# Altium PCB 滚动足球蓝牙款 V1.0 双面板 板厚1.0mm.PcbDoc (part 1 of 2)
Units mm, origin at the board's own origin, x right, y up, seen from the top; angles counter-clockwise.
Board outline 50.85 x 46.58 mm, 2 copper layers (Top Layer, Bottom Layer); 60 components, 35 nets, 162 pads, 92 vias.
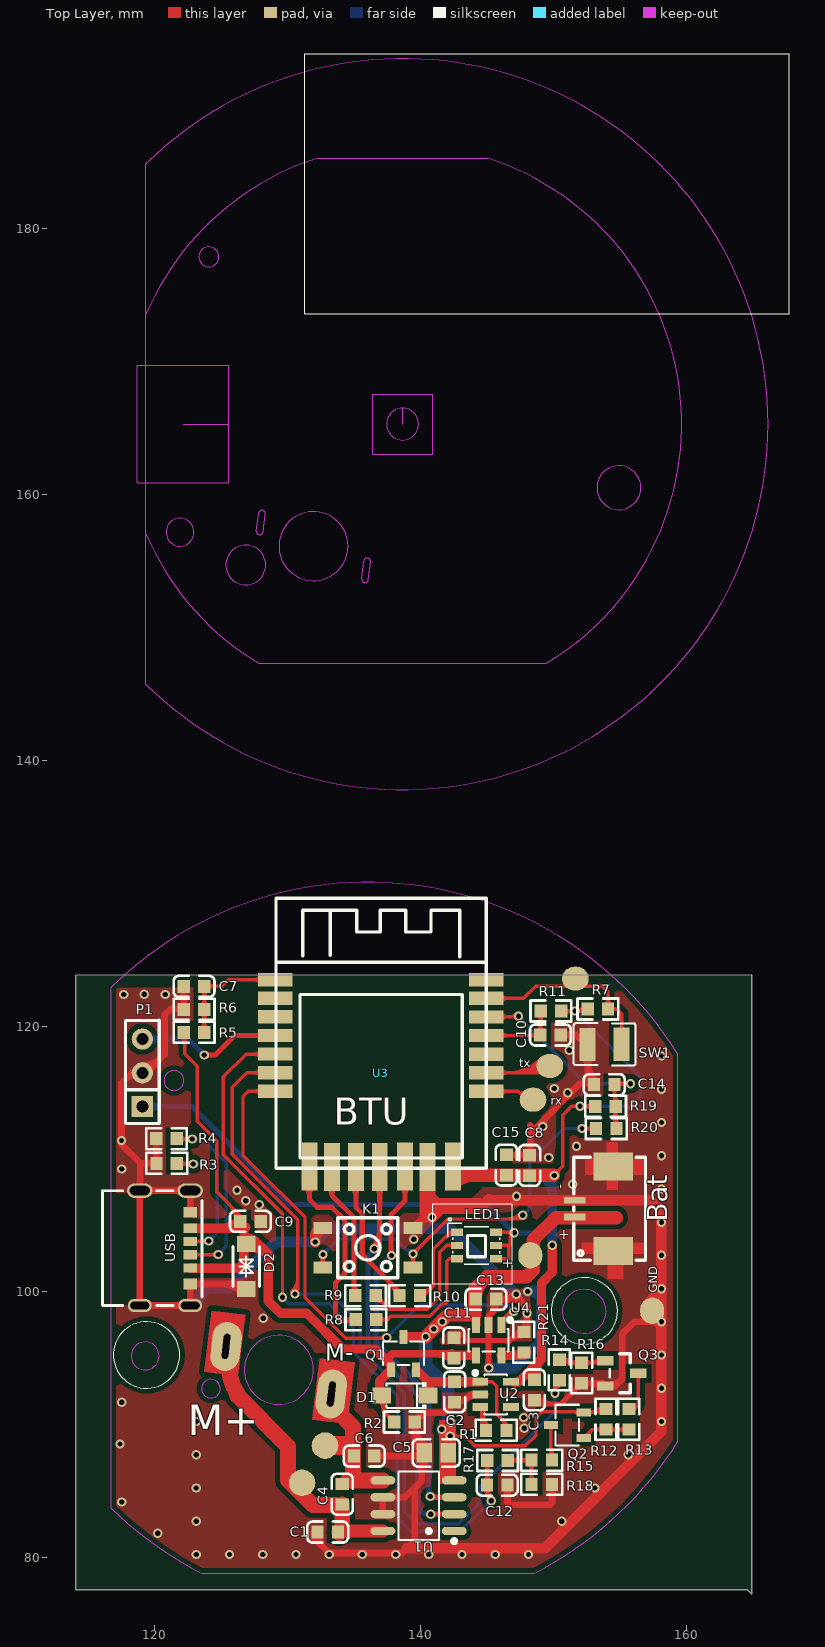
[diagram p0: Top Layer view]
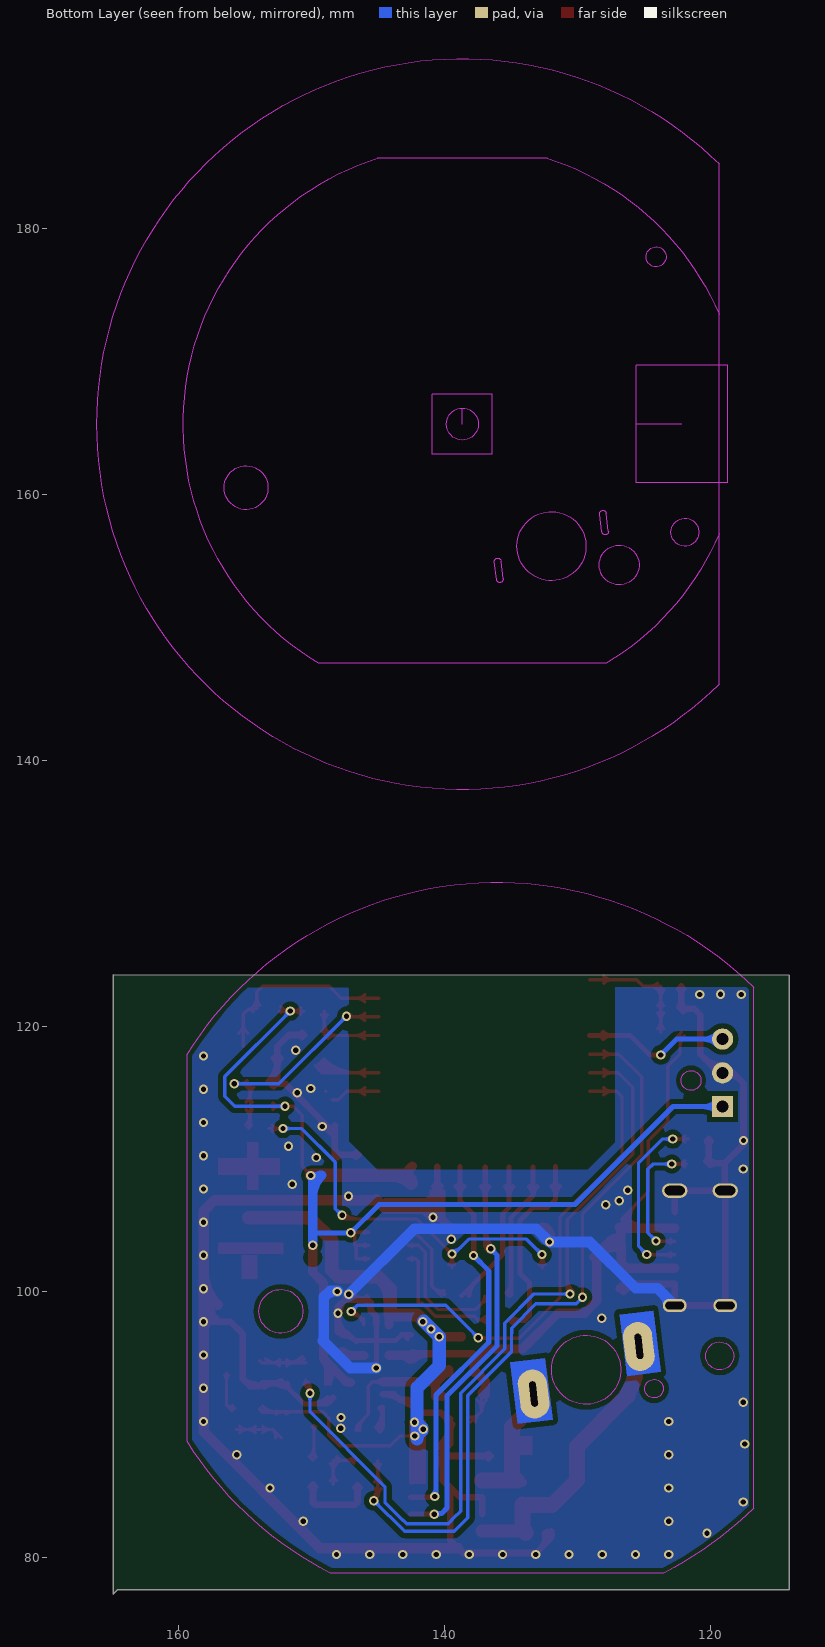
[diagram p1: Bottom Layer view, seen from below]
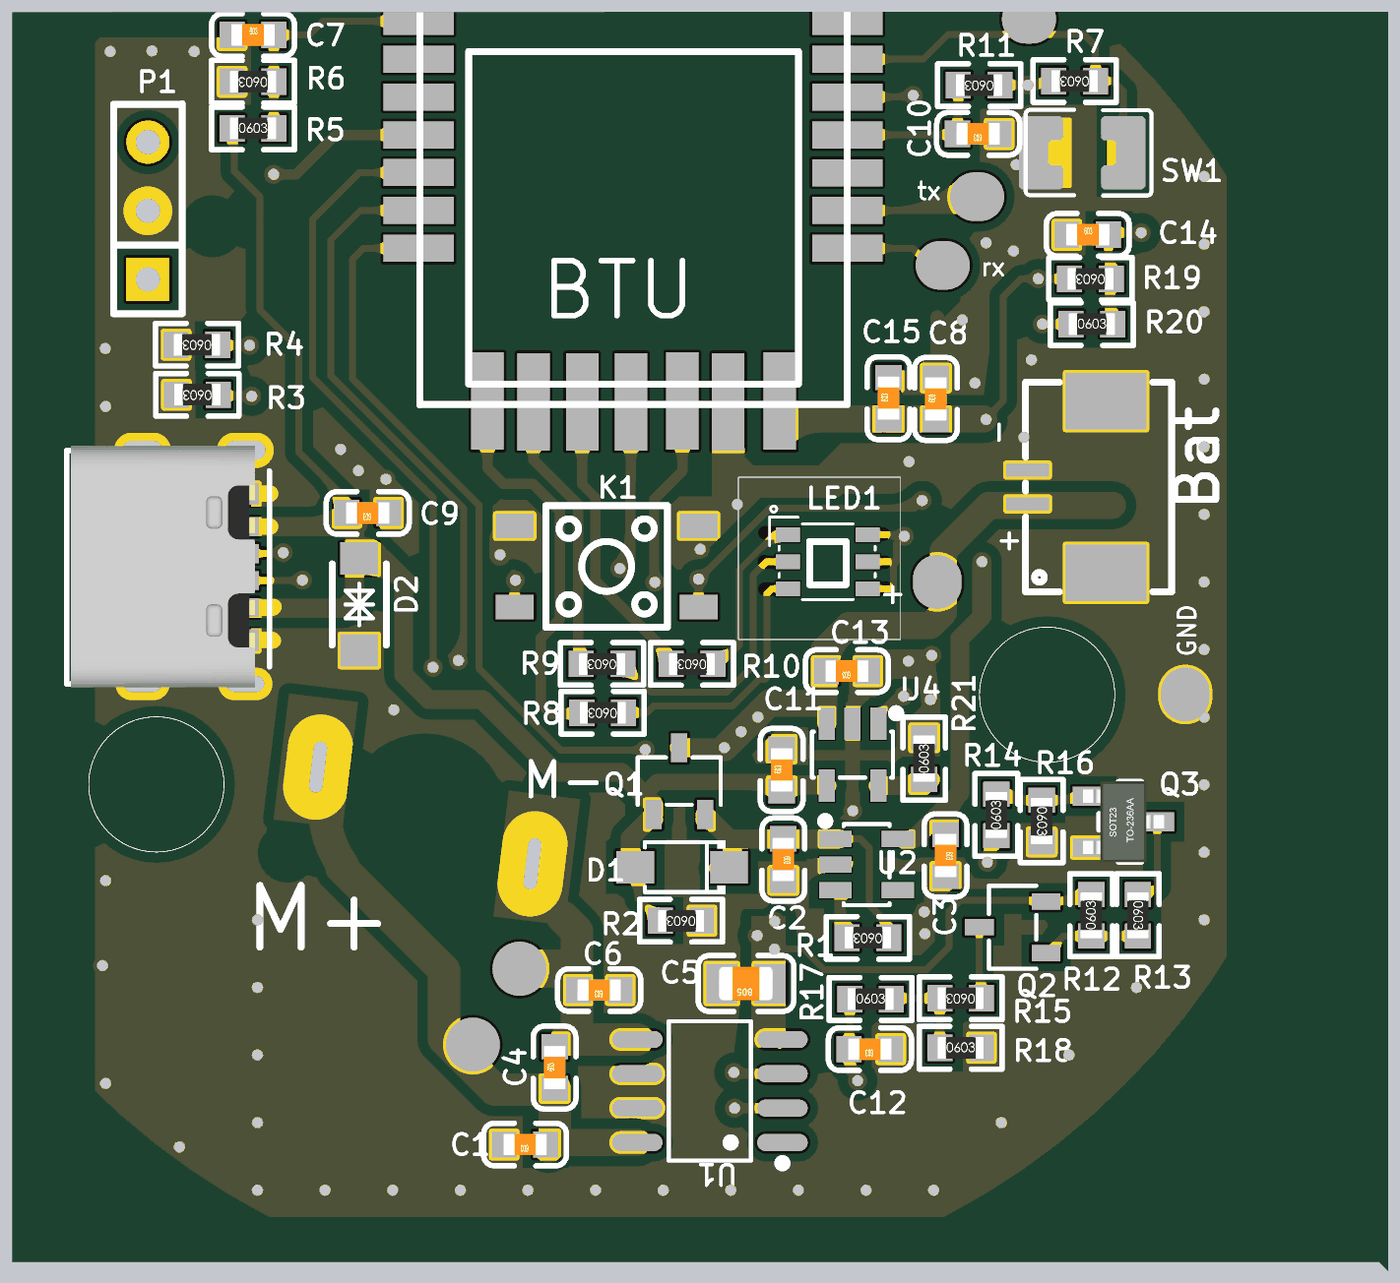
[diagram p3: 3D render of the assembled board from above, using the file's embedded part models]

## Layer stack, top to bottom
Top Layer: signal copper 0.0356
Dielectric: dielectric 0.32, FR-4, Dk 4.8
Bottom Layer: signal copper 0.0356

## Board outline
114.097,123.825 114.097,77.597 164.617,77.597 164.948,77.267 164.948,123.85

## Design rules (kind name [scope] priority, off if disabled: settings)
Clearance [All] p1: gap=0.254
ComponentClearance [All] p1: gap=0 collisioncheckmode=3 verticalgap=0 showdistances=FALSE
MinimumSolderMaskSliver [All] p1: minsoldermaskwidth=0
PolygonConnect [All] p1: connectstyle=Direct reliefconductorwidth=0.254 reliefentries=4 polygonreliefangle="90 Angle"
RoutingVias [All] p1: holewidth=0.711 width=1.27 viastyle="Through Hole" minholewidth=0.711 minwidth=1.27 maxholewidth=0.711 maxwidth=1.27
SilkToSilkClearance [All] p1: silktosilkclearance=0
SilkscreenOverComponentPads [All] p1: minsilkscreentomaskgap=0
SolderMaskExpansion [All] p1: expansion=0.102
TestPointUsage [All] p1: valid=0 allowmultiple=FALSE
Testpoint [All] p1: side=15 testpointundercomponent=TRUE minsize=1.016 maxsize=2.54 preferedsize=1.524 minholesize=0 maxholesize=1.016 preferedholesize=0.813 testpointgrid=0.025 style=1023 order=0-112345678
Width [All] p1: maxlimit=5.08 minlimit=0.254 preferedwidth=0.254 minimp=50.000000 maximp=50.000000 favimp=50.000000
20 further rules are at their usual default settings.

## Classes and differential pairs
component class 旋转球: B- Bat C1 C2 C3 C4 C5 C6 C7 C8 C9 C10 C11 C12 C13 C14 C15 D1 D2 K1 La1 La2 LED1 M+ M- P1 Q1 Q2 Q3 R1 R2 R3 R4 R5 R6 R7 R8 R9 R10 R11 R12 R13 R14 R15 R16 R17 R18 R19 R20 R21 SW1 U1 U2 U3 U4 USB

## Components (designator, comment, footprint, x,y, rotation, side; value= is the part's Value field where it differs from the comment)
Bat "BAT" CONN-SMD_1.25-2PWT 154.559,106.401 r270 top (schematic designator CN1)
C1 "0.1uf/25v" 0603_C 133.045,81.94 r180 top
C2 "1uf" 0603_C 142.596,92.481 r90 top
C3 "10uF" 0603_C 148.59,92.634 r90 top
C4 "0.1uf/25v" 0603_C 134.137,84.785 r270 top
C5 "4.7uf/16v" 0805_C 141.211,87.897 r180 top
C6 "0.1uf/25v" 0603_C 135.788,87.655 r180 top
C7 "0.1uf/25v" 0603_c 122.987,122.987 r0 top
C8 "1uf/25v" 0603_C 148.234,109.525 r270 top
C9 "0.1UF" 0603_c 127.229,105.308 r180 top
C10 "100nF" 0603_c 149.801,119.329 r180 top
C11 "4.7UF" 0603_c 142.532,95.796 r270 top
C12 "100nF" 0603_C 145.796,85.471 r180 top
C13 "10UF" 0603_C 144.945,99.454 r180 top
C14 "100nF" 0603_c 153.848,115.595 r0 top
C15 "100nf/25v" 0603_C 146.482,109.55 r270 top
D1 "" SOD-123FL 138.697,92.037 r180 top
D2 "SMF5.0CA_C726939" "SOD-123 双向" 126.975,102.083 r90 top
GND "J-CSD" TP#1 157.455,98.59 r90 bottom (schematic designator TP3)
K1 "KEY" SW-SMD_4P-L4.5-W4.5-P3.00-LS7.0 136.061,103.326 r0 top locked
LED1 "#NAME?" LED-SMD-6P_S6-3528RGBTA 144.221,103.353 r270 top
M+ "" PAD2#1 125.542,95.907 r150 top (schematic designator M+1)
M- "" PAD2#2 133.325,92.177 r60 top (schematic designator M-1)
P1 "DEBUG" SIP4-2.54 119.101,113.944 r90 top
Q1 "CJ3401" SOT-23 138.963,94.869 r270 top
Q2 "SI2301 P" SOT-23 151.587,90.195 r0 top
Q3 "S8050" SOT-23(SOT-23-3) 155.169,93.878 r180 top
R1 "10k" 0603_R 145.72,89.586 r180 top
R2 "10K" 0603_R 138.811,90.221 r180 top
R3 "5.1K" 0603_R 120.929,109.677 r180 top
R4 "5.1K" 0603_R 120.917,111.531 r180 top
R5 "10K" 0603_R 122.987,119.532 r0 top
R6 "20K" 0603_R 122.987,121.26 r180 top
R7 "560k" 0603_R 153.365,121.285 r180 top
R8 "1k" 0603_R 135.915,97.917 r180 top
R9 "1k" 0603_R 135.89,99.72 r180 top
R10 "1k" 0603_R 139.217,99.72 r180 top
R11 "10K" 0603_R 149.835,121.133 r180 top
R12 "560K" 0603_R 153.975,90.424 r270 top
R13 "1K" 0603_R 155.702,90.424 r90 top
R14 "1K" 0603_r 150.47,94.132 r270 top
R15 "560K" 0603_R 149.149,87.351 r180 top
R16 "10K" 0603_r 152.146,93.904 r90 top
R17 "1K" 0603_R 145.821,87.325 r0 top
R18 "100K" 0603_R 149.149,85.522 r0 top
R19 "10K" 0603_R 153.949,113.97 r180 top
R20 "100R" 0603_R 154,112.293 r0 top
R21 "5.1k" 0603_R 147.803,96.215 r270 top
rx "J-CSD" TP#1 148.488,114.465 r0 bottom (schematic designator TP3)
SW1 "#NAME?" SMD-X160 155.194,118.669 r0 top
TP3 "J-CSD" TP#1 151.676,123.571 r0 bottom
TP3 "J-CSD" TP#2 131.115,85.636 r0 bottom
TP3 "J-CSD" TP#2 132.842,88.443 r0 bottom
TP3 "J-CSD" TP#1 148.285,102.756 r90 bottom
tx "J-CSD" TP#1 149.758,117.005 r0 bottom (schematic designator TP3)
U1 "TC118S" SOP8 139.878,83.922 r90 top
U2 "SSP7615" SOT-23-5 145.847,92.735 r0 top
U3 "BTU" BTU 129.057,105.613 r0 top
U4 "LC4054" SOT-23-5 145.593,96.19 r270 top
USB "TYPE-C 6P" TPYE-C-6 120.802,103.302 r0 top locked (schematic designator USB1)

## Footprints (in the part's own frame and the unit in brackets; to place one, negate y for a bottom-side part, rotate by r counter-clockwise, add the part's x,y. Pads: shape width x height; smd on the part's side, far side on the other; paste and mask are expansions set on the pad)
0603_C [mm]
  rect 0.93x0.98 smd: 1(-0.77,0) 2(0.77,0)
  silkscreen extent -1.54,-0.79 1.54,0.79, body extent -0.8,-0.4 0.8,0.4, height 0.3
0603_c [mm]
  rect 0.93x0.98 smd: 1(-0.77,0) 2(0.77,0)
  silkscreen extent -1.54,-0.79 1.54,0.79, body extent -0.8,-0.4 0.8,0.4, height 0.3
0603_R [mm]
  rect 0.93x0.98 smd: 1(-0.77,0) 2(0.77,0)
  silkscreen extent -1.53,-0.79 1.54,0.79, body extent -0.85,-0.4 0.85,0.4, height 0.56
0603_r [mm]
  rect 0.93x0.98 smd: 1(-0.77,0) 2(0.77,0)
  silkscreen extent -1.53,-0.79 1.54,0.79, body extent -0.85,-0.4 0.85,0.4, height 0.56
0805_C [mm]
  rect 1.16x1.47 smd: 1(-0.89,0) 2(0.89,0)
  silkscreen extent -1.77,-1.04 1.77,1.04, body extent -1,-0.62 1,0.63, height 0.77
BTU [mm]
  rect 2.6x1 smd paste+0 mask+0.102: 1(0.051,17.882) 2(0.051,16.482) 3(0.051,15.082) 4(0.049,13.68) 5(0.051,12.282) 6(0.051,10.882) 7(0.051,9.482) 15(15.9,9.48) 16(15.9,10.88) 17(15.9,12.28) 18(15.9,13.68) 19(15.9,15.08) 20(15.9,16.48) 21(15.9,17.88)
  rect 1.2x3.6 smd paste+0 mask+0.102: 8(2.602,3.834) 9(4.3,3.8) 10(6.1,3.8) 11(7.9,3.8) 12(9.802,3.834) 13(11.5,3.8) 14(13.402,3.834)
  silkscreen extent 0.1,3.68 15.9,24
CONN-SMD_1.25-2PWT [mm]
  rect 0.5x1.6 smd: 1(0.761,-2.934) 2(-0.489,-2.934)
  rect 2.1x3 smd: 3(3.311,-0.034) 4(-3.039,-0.034)
  silkscreen extent -3.74,-3.01 4.01,2.4
LED-SMD-6P_S6-3528RGBTA [mm]
  rect 0.55x0.9 smd paste+0 mask+0.05: 1(-1.148,-1.458) 2(-0.148,-1.458) 3(0.852,-1.458) 4(0.852,1.492) 5(-0.148,1.492) 6(-1.148,1.492)
  silkscreen extent -2.21,-2.13 1.25,1.77
PAD2#1 [mm]
  oval 3.7x2.2 hole 0.5 slot 1.9 at 113 deg rot 113: 1(0.127,0.076)
PAD2#2 [mm]
  oval 3.7x2.2 hole 0.5 slot 1.9 at 23 deg rot 23: 1(0.127,0.076)
SIP4-2.54 [mm]
  rect 1.6x1.6 hole 0.9: 1(0,0)
  round 1.6 hole 0.9: 2(2.54,0) 3(5.08,0)
  silkscreen extent -1.27,-1.27 6.5,1.27
SMD-X160 [mm]
  rect 1.2x2.5 smd paste-100 mask+0.051: 1(-2.595,-0.044) 2(-0.034,-0.04)
  silkscreen extent -3.64,-1.62 1.01,1.55
"SOD-123 双向" [mm]
  rect 1.2x1.4 smd: 1(-1.864,0.06) 2(1.536,0.06)
  silkscreen extent -1.66,-0.94 1.34,1.06
SOD-123FL [mm]
  rect 1.4x1.2 smd: 1(1.579,-0.166) 2(-1.891,-0.166)
  silkscreen extent -1.76,-1.17 1.22,0.84
SOP8 [mm]
  oval 0.63x1.865 smd: 1(-1.905,-2.682) 2(-0.635,-2.682) 3(0.635,-2.682) 4(1.905,-2.682) 5(1.905,2.682) 6(0.635,2.682) 7(-0.635,2.682) 8(-1.905,2.682)
  silkscreen extent -2.82,-2.83 2.58,1.52
SOT-23 [mm]
  rect 1.07x0.6 smd: 1(0.719,-1.166) 2(0.719,0.734) 3(-1.751,-0.216)
  silkscreen extent -1.39,-1.75 0.36,1.32
SOT-23(SOT-23-3) [mm]
  rect 1.25x0.7 smd: 1(1.25,-0.95) 2(1.25,0.95) 3(-1.25,0)
  silkscreen extent -0.65,-1.46 0.9,1.46, body extent -1.5,-1.5 1.5,1.5, height 1.3
SOT-23-5 [mm]
  rect 1.2x0.6 smd paste+0 mask+0.05: 1(-1.325,0.51) 2(-1.325,-0.44) 3(-1.325,-1.39) 4(0.975,-1.39) 5(0.975,0.51)
  silkscreen extent -1.85,-1.94 0.67,1.32
SW-SMD_4P-L4.5-W4.5-P3.00-LS7.0 [mm]
  rect 1.4x0.9 smd: 1(-3.4,1.5) 2(3.4,1.5) 3(-3.4,-1.5) 4(3.4,-1.5)
  silkscreen extent -2.25,-2.25 2.25,2.25
TP#1 [mm]
  oval 2x1.8 smd far side: 1(0,0)
TP#2 [mm]
  round 2 smd far side: 1(0,0)
TPYE-C-6 [mm]
  oval 1.9x1.1 hole 0.7 slot 1.5 at 0 deg: 7(-1.9,4.32) 7(1.9,4.32)
  oval 1.8x1 hole 0.6 slot 1.4 at 0 deg: 7(-1.9,-4.32) 7(1.9,-4.32)
  rect 1x0.7 smd: A5(1.9,0.5) A9(1.9,-1.5) B5(1.9,-0.5) B9(1.9,1.5)
  rect 1x0.8 smd: A12(1.9,-2.7) B12(1.9,2.7)
  silkscreen extent -4.7,-4.32 2.79,4.32, body extent -4.55,-4.45 2.25,4.49, height 3.41

## Part data
Bat: library part HC-1.25-2PLT
C1 C2 C3 C4 C5 C6 C7 C8 C15: library part Cap, "Capacitor"
C9 C10 C11 C12 C13: library part CAP
C14: library part CAP_0603
D1: library part "Diode 1N4148", "High Conductance Fast Diode"
K1: library part TS-1002S-05026C
LED1: library part S6-3528RGBTA
M+ M-: library part CON1
P1: library part "Header 4", "Header, 4-Pin"
Q2: library part JMTL3400A
Q3: library part NPN_sot23, "NPN三极管"
R1 R3 R4 R5 R6 R7 R8 R9 R10 R11 R12 R13 R15 R17 R18 R21: library part RES
R2 R14 R16: library part Res2, "Resistor"
R19 R20: library part Res_0603
SW1: library part SW-18010P
U2: library part SSP7615-33M5R
U4: library part LTC4054

## Via types
v1: diameter 0.7, hole 0.4, Top Layer to Bottom Layer, tented both sides, 92 vias

## Nets (pads, with @x,y where several pads share a name; then routed paths per layer and width w, separated by ;. In a path a pad name is that pad's centre, name@x,y a point inside that pad or via, vN(x,y) a via of type N, cw(c..) or ccw(c..) an arc to the next point about the centre after c; other vN are vias at no path point)
3V3: C3.2 C8.2 C15.2 LED1.4 LED1.5 LED1.6 P1.1 R7.2 R11.1 R19.2 U2.5 U3.14 | length 110.9
  Top Layer w0.254: LED1.4@145.713,102.501 146.672,102.501 146.672,103.399 146.774,103.501 ; LED1.5@145.713,103.501 146.774,103.501 ; LED1.6@145.713,104.501 v1@146.908,104.501 ; LED1.4@145.993,102.396 cw(c146.246,102.143) 146.246,102.501 cw(c146.246,102.858) LED1.4@145.993,102.605 ; LED1.5@145.993,103.396 cw(c146.246,103.143) 146.246,103.501 cw(c146.246,103.858) LED1.5@145.993,103.605 ; LED1.6@145.993,104.396 cw(c146.246,104.143) 146.246,104.501 cw(c146.246,104.858) LED1.6@145.993,104.605 ; 146.393,104.501 cw(c146.393,103.772) 146.908,104.287 146.774,104.153 146.774,103.501 ; 146.663,104.501 ccw(c146.663,104.848) v1@146.908,104.602 ; v1@150.063,108.788 150.724,109.449 150.724,113.309 151.384,113.97 v1(152.019,113.97) 153.154,113.97 R19.2@153.179,113.995 ; v1@150.089,108.986 ccw(c150.089,109.402) 150.383,109.108 ; v1@150.312,108.763 cw(c150.973,108.763) 150.505,109.23 ; R11.1@150.605,121.133 v1(151.638,121.133) ; R11.1@150.844,120.894 cw(c151.421,120.317) 151.421,121.133 cw(c151.421,121.949) R11.1@150.844,121.372 ; v1@151.48,120.975 ccw(c151.1,120.594) 151.1,121.133 ccw(c151.1,121.671) v1@151.48,121.29 ; v1@151.796,120.975 cw(c152.176,120.594) 152.176,121.133 cw(c152.176,121.671) v1@151.796,121.29 ; v1@151.861,113.812 ccw(c151.481,113.431) 151.481,113.97 ccw(c151.481,114.508) v1@151.861,114.127 ; 152.087,121.133 cw(c152.087,120.752) R7.2@152.356,121.021 ; v1@152.177,113.812 cw(c152.557,113.431) 152.557,113.97 cw(c152.557,114.508) v1@152.177,114.127 ; R7.2@152.329,121.469 cw(c151.638,122.012) v1(151.638,121.133) ; v1@152.362,113.97 ccw(c152.362,114.787) R19.2@152.94,114.209 ; v1@152.364,113.97 cw(c152.364,113.155) R19.2@152.94,113.731 ; R7.2@152.443,121.133 v1(151.638,121.133)
  Top Layer w0.7: U3.14@142.459,109.447 143.126,108.78 ; U2.5@147.122,93.195 ccw(c147.122,93.775) 147.532,93.365 ; U2.5@147.412,93.245 149.125,94.959 ; C3.2@148.726,93.435 cw(c150.229,93.855) 149.125,94.959 ; v1(149.936,103.505) 149.936,101.487 149.125,100.676 149.125,94.959
  Top Layer w1: U3.14@142.53,108.176 cw(c143.988,106.718) 143.988,108.78 ; U3.14@142.559,108.242 cw(c143.126,108.213) 143.126,108.78 C15.2@146.482,108.78 148.234,108.78 v1@150.004,108.78
  Bottom Layer w0.254: 149.885,104.445 149.936,104.394 ; v1@151.638,120.91 cw(c151.638,120.371) 152.019,120.752 cw(c152.399,121.133) v1@151.861,121.133 ; v1(151.638,121.133) 156.56,116.211 156.56,114.726 155.804,113.97 v1(152.019,113.97) ; v1@152.177,113.812 cw(c152.557,113.431) 152.557,113.97 cw(c152.557,114.508) v1@152.177,114.127
  Bottom Layer w0.381: P1.1@118.593,113.944 P1.1@119.101,113.944 122.834,113.944 130.2,106.578 144.932,106.578 v1(147.066,104.445) 149.885,104.445 ; P1.1@119.532,113.513 cw(c120.572,112.473) 120.572,113.944 cw(c120.572,115.416) P1.1@119.532,114.375 ; v1@146.907,104.445 ccw(c146.521,104.445) 146.794,104.717 ccw(c147.066,104.989) v1@147.066,104.604 ; v1@147.179,104.332 cw(c147.451,104.06) 147.451,104.445 cw(c147.451,104.83) v1@147.179,104.558
  Bottom Layer w0.7: v1(149.936,103.505) 149.936,104.394 v1@149.936,108.661 ; 149.936,107.133 ccw(c147.595,107.133) 149.25,108.788 cw(c149.239,108.091) 149.936,108.091 ; 149.936,108.395 cw(c150.457,108.395) v1(150.089,108.763)
AD_BAT: C12.2 R17.1 U3.5 | length 64.5
  Top Layer w0.254: U3.5@128.044,117.631 ccw(c127.408,116.994) 127.408,117.895 ccw(c127.408,118.795) U3.5@128.044,118.159 ; U3.5@129.108,117.895 126.912,117.895 125.197,116.18 125.197,110.312 129.642,105.867 v1(129.642,99.593) ; C12.2@144.787,85.207 cw(c144.21,84.63) 145.026,84.63 cw(c145.842,84.63) C12.2@145.265,85.207 ; C12.2@144.787,85.735 ccw(c144.149,86.373) 145.051,86.373 ; R17.1@144.812,87.061 cw(c144.235,86.484) 145.051,86.484 cw(c145.867,86.484) R17.1@145.29,87.061 ; 145.026,84.917 ccw(c145.868,84.917) v1@145.319,84.279 ; 145.051,86.251 ccw(c145.781,86.251) C12.2@145.265,85.735 ; R17.1@145.051,87.325 145.051,85.496 C12.2@145.026,85.471 ; v1(145.339,84.303) 145.026,84.615 C12.2@145.026,85.471 ; v1@145.484,84.472 cw(c146.345,85.471) C12.2@145.026,85.471
  Bottom Layer w0.254: v1(129.642,99.593) 130.124,99.111 133.147,99.111 134.976,97.282 134.976,96.876 134.981,96.87 134.981,95.506 138.278,92.21 138.278,83.007 139.294,81.991 143.027,81.991 v1(145.339,84.303) ; v1@145.116,84.303 cw(c144.577,84.303) 144.958,83.922 cw(c145.339,83.541) v1@145.339,84.08
BAT+: Bat.1 C5.1 C13.2 Q1.3 Q2.2 R12.1 TP3.1@148.285,102.756 U1.4 U4.3 | length 62.4
  Top Layer w0.254: C5.1@141.781,87.421 cw(c141.468,87.108) 141.911,87.108 ; 141.866,86.521 cw(c141.405,86.06) U1.4@142.003,85.8 ; 141.911,86.462 cw(c143.052,86.462) C5.1@142.371,87.378 ; 141.911,86.967 cw(c142.677,86.967) C5.1@142.22,87.582 ; C5.1@141.911,88.036 141.911,86.476 U1.4@142.56,85.827 ; 142.13,86.257 cw(c141.774,85.9) U1.4@142.236,85.699 ; v1(142.265,89.167) 143.345,89.167 144.094,88.417 147.904,88.417 148.717,89.23 148.717,90.551 149.146,90.98 Q2.2@152.687,90.98 ; U1.4@142.394,85.993 cw(c142.142,85.74) U1.4@142.469,85.598 ; v1@142.423,89.009 cw(c142.804,88.628) 142.804,89.167 cw(c142.804,89.705) v1@142.423,89.324 ; 151.531,90.98 cw(c151.531,90.389) Q2.2@151.949,90.807 ; Q2.2@152.306,90.929 153.71,90.929 R12.1@153.975,91.194 ; Q2.2@152.494,90.929 ccw(c152.494,92.65) R12.1@153.711,91.433 ; Q2.2@152.664,90.807 cw(c152.959,90.511) 152.959,90.929 cw(c152.959,91.347) Q2.2@152.664,91.051 ; 153.107,90.929 ccw(c153.107,92.036) R12.1@153.89,91.253
  Top Layer w0.7: Q1.3@138.747,96.62 v1(140.412,96.62) ; U4.3@144.203,97.515 C13.2@144.203,99.38
  Top Layer w1: v1(140.412,96.62) 142.065,98.273 144.099,98.273 144.099,100.233 145.009,101.143 148.031,101.143 148.514,101.625 148.514,103.911 150.192,105.589 154.762,105.589 ; C13.2@144.14,99.479 cw(c146.061,99.479) 144.703,100.837
  Bottom Layer w1: v1@141.587,97.795 v1(140.412,96.62) 140.412,94.461 141.763,93.111 142.088,92.786 v1@142.088,89.027 ; v1@141.736,89.569 ccw(c140.889,90.416) v1@142.088,90.416 ; v1@141.736,89.781 cw(c140.889,88.933) v1@142.088,88.933
  other v1: 141.63,89.675 142.278,90.195 141.031,97.213 141.656,97.752
CC1: R3.1 USB.A5 | length 15.7
  Top Layer w0.254: R3.1@121.788,109.626 v1(122.936,109.626) ; R3.1@121.938,109.413 cw(c122.453,108.898) 122.453,109.626 ; R3.1@121.938,109.891 ccw(c122.578,110.531) 122.578,109.626 ; USB.A5@122.702,103.802 124.071,103.802 v1(124.104,103.835) ; v1@122.778,109.469 ccw(c122.398,109.088) 122.398,109.626 ccw(c122.398,110.165) v1@122.778,109.784 ; USB.A5@123.01,103.644 cw(c123.391,103.264) 123.391,103.802 cw(c123.391,104.34) USB.A5@123.01,103.96 ; 123.486,103.802 ccw(c123.486,104.454) v1@123.947,103.993 ; 123.646,103.802 cw(c123.646,103.377) v1@123.947,103.678
  Bottom Layer w0.254: v1(122.936,109.626) 124.333,109.626 124.739,109.22 124.739,104.47 v1(124.104,103.835) ; v1@123.094,109.469 cw(c123.474,109.088) 123.474,109.626 cw(c123.474,110.165) v1@123.094,109.784 ; v1@124.104,104.058 ccw(c124.104,104.597) 124.485,104.216 ccw(c124.866,103.835) v1@124.327,103.835
CC2: R4.1 USB.B5 | length 19.3
  Top Layer w0.254: R4.1@121.687,111.531 121.712,111.506 v1(122.86,111.506) ; R4.1@121.926,111.267 cw(c122.502,110.691) 122.502,111.506 ; R4.1@121.926,111.745 ccw(c122.504,112.323) 122.504,111.506 ; USB.B5@122.702,102.802 124.798,102.802 v1(124.816,102.819) ; v1@122.702,111.348 ccw(c122.321,110.968) 122.321,111.506 ccw(c122.321,112.044) v1@122.702,111.664 ; USB.B5@123.01,102.644 cw(c123.391,102.264) 123.391,102.802 cw(c123.391,103.34) USB.B5@123.01,102.96 ; 124.236,102.802 ccw(c124.236,103.399) v1@124.658,102.977 ; 124.319,102.802 cw(c124.319,102.323) v1@124.658,102.662
  Bottom Layer w0.254: v1(122.86,111.506) 123.647,111.506 125.425,109.728 125.425,103.429 v1(124.816,102.819) ; v1@123.017,111.348 cw(c123.398,110.968) 123.398,111.506 cw(c123.398,112.044) v1@123.017,111.664 ; v1@124.816,103.042 ccw(c124.816,103.581) 125.196,103.2 ccw(c125.577,102.819) v1@125.039,102.819
CHARGE: U3.7 U4.1 | length 45.1
  Top Layer w0.254: U3.7@128.044,114.831 ccw(c127.408,114.194) 127.408,115.095 ccw(c127.408,115.995) U3.7@128.044,115.359 ; U3.7@129.108,115.095 127.071,115.095 126.67,114.694 126.67,110.276 127.452,109.494 131.337,105.609 131.337,99.567 134.384,96.52 v1@137.49,96.52 ; 136.891,96.52 ccw(c136.891,97.145) v1@137.333,96.703 ; 137.013,96.52 cw(c137.013,96.068) v1@137.333,96.388 ; U4.1@146.103,97.515 146.103,97.843 v1@146.837,98.577 ; U4.1@146.103,97.988 ccw(c146.103,98.339) U4.1@146.351,98.091 ; U4.1@146.226,97.966 cw(c147.041,97.152) v1@147.041,98.304 ; U4.1@146.276,97.815 cw(c146.76,97.815) 146.417,98.157 ; 146.66,98.4 cw(c147.041,98.019) v1@147.041,98.558
  Bottom Layer w0.254: v1(137.49,96.545) 139.941,98.996 146.571,98.996 v1(147.041,98.527) ; v1@137.49,96.768 ccw(c137.49,97.307) 137.871,96.926 ccw(c138.252,96.545) v1@137.713,96.545 ; v1@146.818,98.527 ccw(c146.279,98.527) 146.66,98.907 ccw(c147.041,99.288) v1@147.041,98.75
DUBEG_RX: rx.1 U3.15 | length 5.2
  Top Layer w0.254: U3.15@144.957,115.093 147.378,115.093 148.006,114.465 rx.1@148.488,114.465 ; U3.15@146.021,114.829 cw(c146.658,114.193) 146.658,115.093 cw(c146.658,115.994) U3.15@146.021,115.357 ; rx.1@148.939,115.093 rx.1@148.958,115.113
DUBEG_TX: tx.1 U3.16 | length 14.9
  Top Layer w0.254: U3.16@144.957,116.493 149.247,116.493 tx.1@149.758,117.005 ; U3.16@146.021,116.229 cw(c146.658,115.593) 146.658,116.493 cw(c146.658,117.394) U3.16@146.021,116.757 ; 146.556,116.493 ccw(c146.556,120.107) tx.1@149.112,117.552 ; 147.17,116.493 ccw(c147.17,119.494) tx.1@149.291,117.372 ; 147.783,116.493 ccw(c147.783,118.881) tx.1@149.471,117.192 ; 148.396,116.493 ccw(c148.396,118.267) tx.1@149.651,117.013